# Altium PCB PCB1.PcbDoc
Units mm, origin at the board's own origin, x right, y up, seen from the top; angles counter-clockwise.
Board outline 126.62 x 101.6 mm, 2 copper layers (Top Layer, Bottom Layer); 25 components, 13 nets, 56 pads, 8 vias.
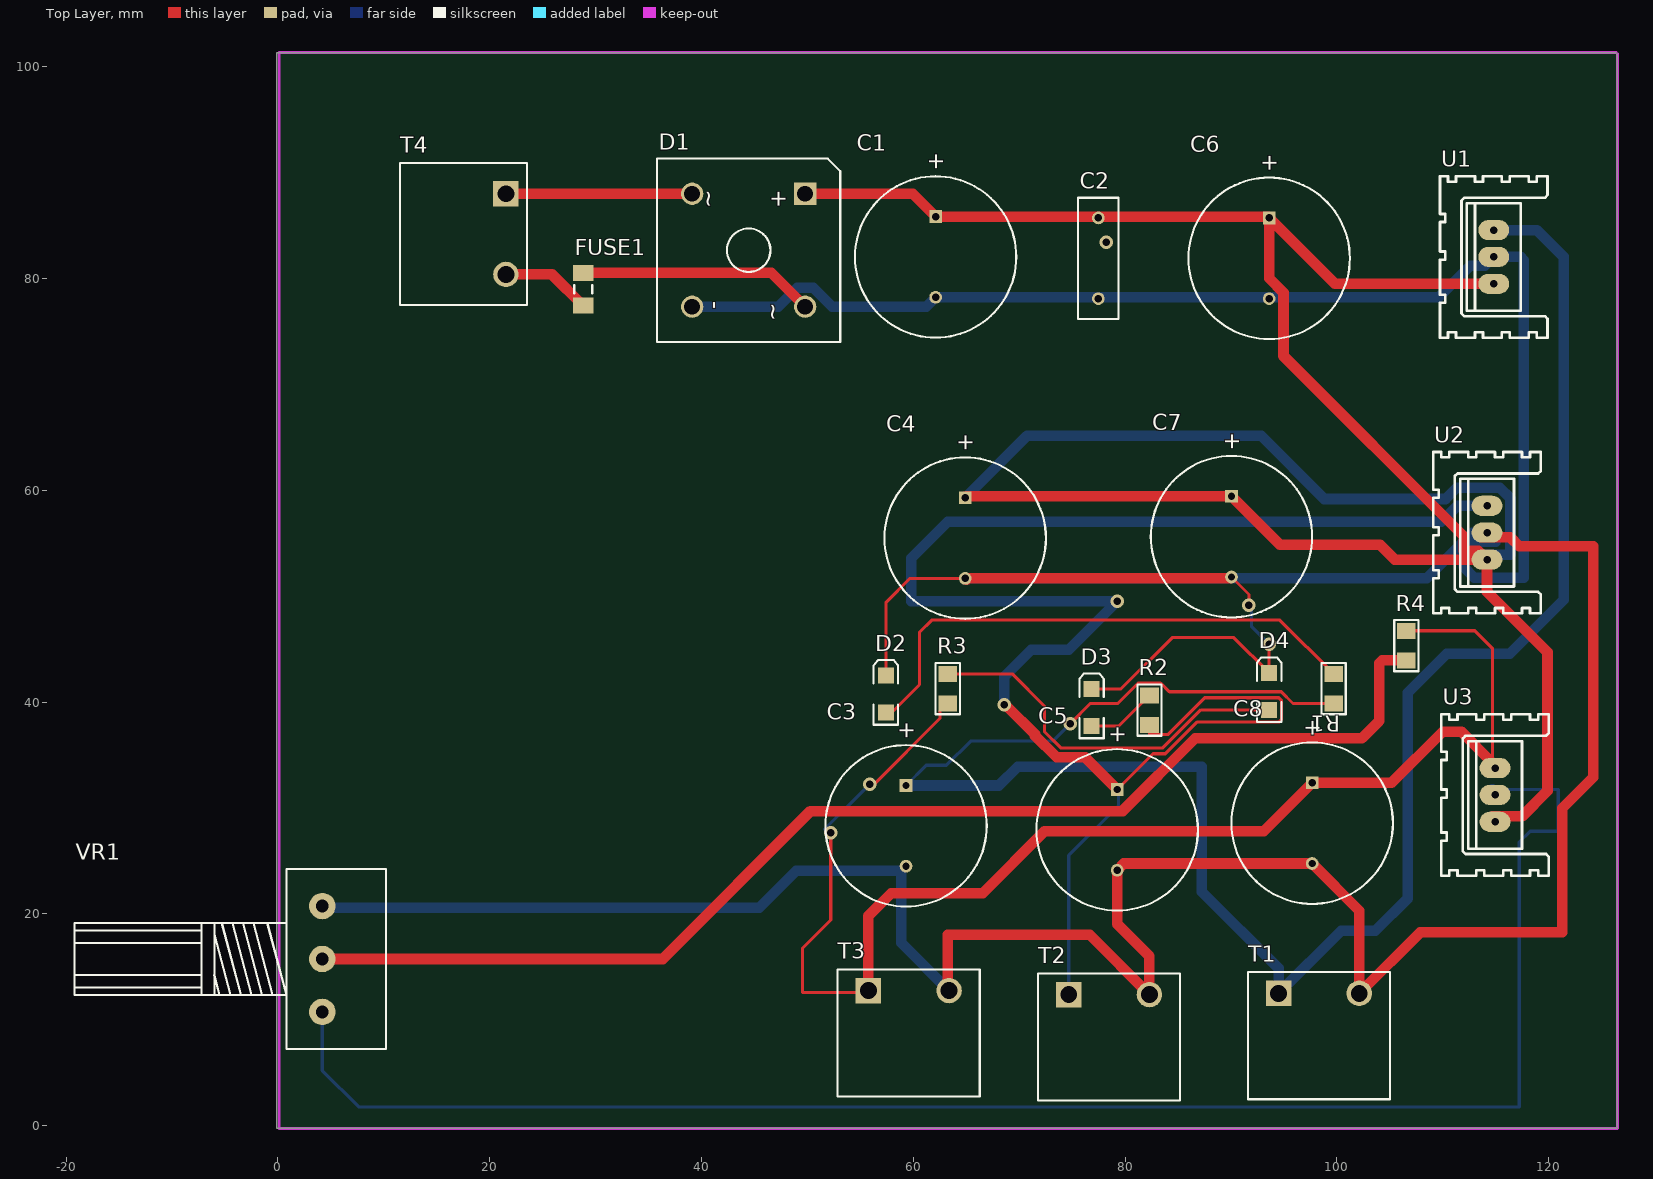
[diagram p0: Top Layer view]
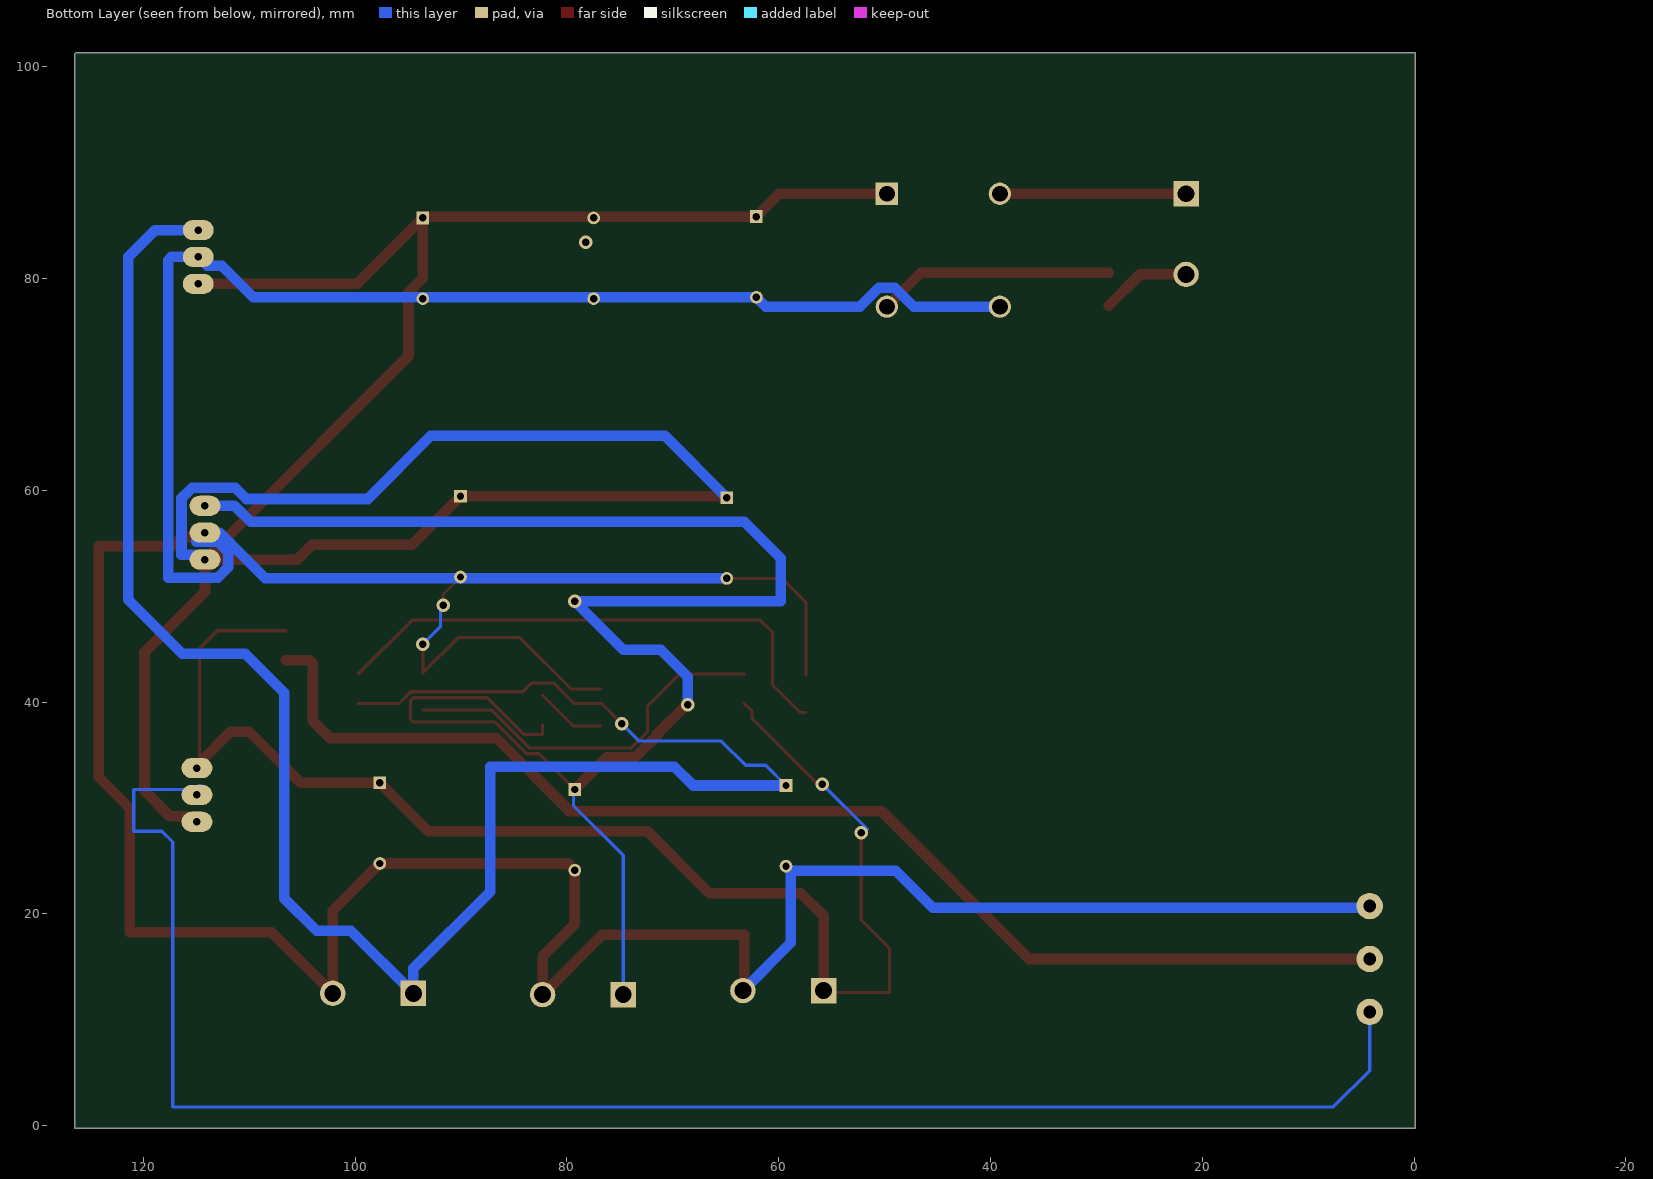
[diagram p1: Bottom Layer view, seen from below]

## Layer stack, top to bottom
Top Solder: solder mask 0.0102, Solder Resist, Dk 3.5
Top Layer: signal copper 0.0356
Dielectric 1: dielectric 0.32, FR-4, Dk 4.8
Bottom Layer: signal copper 0.0356
Bottom Solder: solder mask 0.0102, Solder Resist, Dk 3.5

## Board outline
-0.127,-0.254 -0.127,101.346 126.365,101.346 126.492,101.219 126.492,-0.254

## Design rules (kind name [scope] priority, off if disabled: settings)
Clearance [All] p1: gap=0.254
PolygonConnect [All] p1: connectstyle=Relief reliefconductorwidth=0.254 reliefentries=4 polygonreliefangle="90 Angle" airgapwidth=0.254
RoutingVias [All] p1: holewidth=0.711 width=1.27 viastyle="Through Hole" minholewidth=0.711 minwidth=1.27 maxholewidth=0.711 maxwidth=1.27
SolderMaskExpansion [All] p1: expansion=0.102
Width [All] p1: maxlimit=1 minlimit=0.254 preferedwidth=0.254
30 further rules are at their usual default settings.

## Components (designator, comment, footprint, x,y, rotation, side; value= is the part's Value field where it differs from the comment)
C1 "1000uf-35v" RB7.6-15 62.103,82.042 r90 top
C2 "Cap" RAD-0.3 77.47,81.915 r270 top
C3 "1000uf-35v" RB7.6-15 59.309,28.321 r90 top
C4 "1000uf-35v" RB7.6-15 64.897,55.499 r90 top
C5 "1000uf-35v" RB7.6-15 79.248,27.94 r90 top
C6 "1000uf-35v" RB7.6-15 93.599,81.915 r90 top
C7 "1000uf-35v" RB7.6-15 90.043,55.626 r90 top
C8 "1000uf-35v" RB7.6-15 97.663,28.575 r90 top
D1 "Bridge2" D-46_6A 44.45,82.677 r270 top
D2 "LED2" 3.2X1.6X1.1 57.404,40.767 r90 top
D3 "LED2" 3.2X1.6X1.1 76.835,39.497 r90 top
D4 "LED2" 3.2X1.6X1.1 93.599,41.021 r90 top
FUSE1 "FUSE" 1206_F 28.829,78.994 r90 top
R1 "2.2k red" 1206_R 99.695,41.275 r270 top
R2 "5.6k green" 1206_R 82.296,39.243 r270 top
R3 "7.6k yellow" 1206_R 63.246,41.275 r270 top
R4 "1k" 1206_R 106.553,45.339 r90 top
T1 "Phoenix 2 Pin" Phoenix_2PIN_RA_P7.62mm 98.298,8.509 r0 top
T2 "Phoenix 2 Pin" Phoenix_2PIN_RA_P7.62mm 78.486,8.382 r0 top
T3 "Phoenix 2 Pin" Phoenix_2PIN_RA_P7.62mm 59.563,8.763 r0 top
T4 "Phoenix 2 Pin" Phoenix_2PIN_RA_P7.62mm 17.526,84.201 r270 top
U1 "LM7805" LM78XXCT_HEATSINK 114.808,82.042 r90 top
U2 "LM7812" LM78XXCT_HEATSINK 114.173,56.007 r90 top
U3 "LM317" LM78XXCT_HEATSINK 114.935,31.242 r90 top
VR1 "10k" POT_WH148 4.191,15.748 r270 top

## Footprints (in the part's own frame and the unit in brackets; to place one, negate y for a bottom-side part, rotate by r counter-clockwise, add the part's x,y. Pads: shape width x height; smd on the part's side, far side on the other; paste and mask are expansions set on the pad)
3.2X1.6X1.1 [mm] "SMT LED; 2 Flat Leads"
  rect 1.5x1.5 smd: 1(-1.75,0) 2(1.75,0)
  silkscreen extent -2.9,-1.15 3.2,1.15
1206_F [mm] "Surface mount FUSE 1206"
  rect 1.5x1.9 smd: 1(-1.55,0) 2(1.55,0)
  silkscreen extent -0.4,-0.85 0.4,0.85, body extent -1.6,-0.83 1.6,0.83, height 0.56
1206_R [mil] "Resistor"
  rect 60x70 smd: 1(-55,0) 2(55,0)
  silkscreen extent -95,-45 95,45, body extent -79,-31 79,32, height 60
D-46_6A [mm] "Bridge Rectifier; 4 Terminals; Body 16.8 x 16.8 mm (typ); Pitch 10.67 mm"
  rect 2.1x2.1 hole 1.5: 1(-5.335,5.335)
  round 2.1 hole 1.5: 2(-5.335,-5.335) 3(5.335,-5.335) 4(5.335,5.335)
  silkscreen extent -8.65,-8.65 8.65,8.65, body extent -8.65,-8.65 8.65,8.65, height 6.35
LM78XXCT_HEATSINK [mil]
  oval 75x115 hole 28: 1(-100,0) 2(0,0) 3(100,0)
  silkscreen extent -300,-200 300,200
Phoenix_2PIN_RA_P7.62mm [mm] "Phoenix 2 Pin; Pitch 7.62mm;"
  rect 2.4x2.4 hole 1.6: 1(-3.81,4)
  round 2.4 hole 1.6: 2(3.81,4)
  silkscreen extent -6.71,-6 6.71,6, body extent -6.71,-6 6.71,6, height 8.55
POT_WH148 [mm] "Chip Variable Resistor, 3-Leads, Body 5x5x5mm"
  round 2.5 hole 1.2: 1(-5,0) 2(5,0) 3(0,0)
  silkscreen extent -8.5,-23.4 8.5,6, body extent -8.5,-23.55 8.5,6.25, height 21.5
RAD-0.3 [mm] "Radial Cap, Thru-Hole; 2 Leads; 0.3 in Pin Spacing"
  round 1.2 hole 0.7: 1(-3.81,0) 2(3.81,0)
  silkscreen extent -5.71,-1.91 5.71,1.91
RB7.6-15 [mm] "Polarized Capacitor (Radial); 2 Leads"
  rect 1.2x1.2 hole 0.7: 1(3.81,0)
  round 1.2 hole 0.7: 2(-3.81,0)
  silkscreen extent -7.62,-7.62 7.62,7.62

## Part data
C1 C3 C4 C5 C6 C7 C8: library part "Cap Pol1", "Polarized Capacitor (Radial)"
C2: "Capacitor"
D1: "Diode Bridge"
D2 D3 D4: "Typical RED, GREEN, YELLOW, AMBER GaAs LED"
FUSE1: library part "FUSE SMD"
R1 R2 R3 R4: library part "Resistor SMD", "SMD Resistor"
U1 U2 U3: library part LM78XX, "LM78XX"
VR1: library part "Pot Res Var", "Variable Resistor"

## Via types
v1: diameter 1.27, hole 0.711, Top Layer to Bottom Layer, 8 vias

## Nets (pads, with @x,y where several pads share a name; then routed paths per layer and width w, separated by ;. In a path a pad name is that pad's centre, name@x,y a point inside that pad or via, vN(x,y) a via of type N, cw(c..) or ccw(c..) an arc to the next point about the centre after c; other vN are vias at no path point)
NetC1_1: C1.1 C2.1 C4.1 C6.1 C7.1 D1.1 U1.1 U2.1 U3.1 | length 257.9
  Top Layer w1: D1.1 59.943,88.012 C1.1 93.472,85.852 C6.1 ; C4.1@65.024,59.436 C7.1 94.623,54.856 104.071,54.856 105.46,53.467 U2.1 ; U3.1@114.681,29.21 117.475,29.21 119.888,31.623 119.888,44.704 114.173,50.419 U2.1 ; U1.1 99.822,79.502 C6.1 ; C6.1 93.599,80.02 94.953,78.666 94.953,72.687 111.958,55.682 111.958,54.3 113.34,54.3 U2.1
  Bottom Layer w1: C4.1 70.739,65.151 92.837,65.151 98.806,59.182 110.252,59.182 ; 110.379,59.309 111.324,60.254 115.388,60.254 116.388,59.254 116.388,53.92 U2.1@113.72,53.92 ; U2.1 U2.1@114.626,53.014
NetC1_2: C1.2 C2.2 C3.2 C4.2 C5.2 C6.2 C7.2 C8.2 D1.3 D2.2 D3.2 D4.2 T1.2 T2.2 T3.2 U1.2 U2.2 VR1.1 | length 458.4
  Top Layer w0.3: D2.2 57.404,49.403 59.69,51.689 C4.2 ; D3.2 79.601,41.247 84.455,46.101 90.269,46.101 D4.2 v1(93.599,45.466) v1@93.472,45.593 ; C7.2 91.694,50.165 v1(91.694,49.149)
  Top Layer w1: T3.2@63.246,12.89 63.246,18.034 76.644,18.034 T2.2 82.296,16.002 79.248,19.05 C5.2 79.883,24.765 C8.2 102.108,20.32 T1.2 107.887,18.288 121.285,18.288 121.285,29.972 124.206,32.893 124.206,54.737 117.205,54.737 116.388,55.554 U2.2@113.72,55.554 ; C4.2 C4.2@65.151,51.689 ; C4.2@65.024,51.562 C4.2@65.151,51.689 ; C7.2@89.916,51.689 C4.2@65.151,51.689
  Bottom Layer w0.3: v1@91.821,49.53 91.948,49.53 91.948,47.117 v1(93.599,45.466)
  Bottom Layer w1: VR1.1@4.365,20.574 45.466,20.574 48.958,24.066 58.864,24.066 58.864,17.272 T3.2 ; D1.3 47.234,77.342 49.038,79.146 50.532,79.146 52.336,77.342 61.213,77.342 C1.2@61.976,78.105 ; C1.2 109.617,78.232 112.593,81.209 113.975,81.209 U1.2 117.332,82.042 117.658,81.717 117.658,51.76 112.958,51.76 111.958,52.76 111.958,54.174 112.958,55.174 115.006,55.174 U2.2 112.792,56.007 108.474,51.689 C4.2
NetC3_1: C3.1 R1.2 T1.1 U1.3 | length 192
  Top Layer w0.3: v1(74.803,37.973) 76.708,39.878 79.312,39.878 81.24,41.806 83.352,41.806 84.179,40.979 94.746,40.979 95.847,39.878 R1.2
  Bottom Layer w0.3: C3.1 61.214,34.036 63.119,34.036 65.405,36.322 73.152,36.322 v1(74.803,37.973)
  Bottom Layer w1: C3.1 68.072,32.131 69.85,33.909 87.249,33.909 87.249,22.098 94.488,14.859 T1.1 100.394,18.415 103.632,18.415 106.68,21.463 106.68,40.894 110.363,44.577 116.332,44.577 121.412,49.657 121.412,82.042 118.872,84.582 U1.3
NetC5_1: C5.1 R2.2 T2.1 U2.3 | length 166.1
  Top Layer w0.3: C5.1 82.631,35.133 83.795,35.133 86.779,38.117 94.516,38.117 94.753,38.354 94.753,40.188 94.516,40.425 87.521,40.425 84.03,36.934 82.296,36.934 R2.2
  Top Layer w1: v1@68.834,39.624 71.486,36.972 71.486,36.837 73.54,34.783 76.215,34.783 C5.1
  Bottom Layer w0.3: T2.1 74.676,25.527 79.375,30.226 C5.1@79.375,31.623
  Bottom Layer w1: v1(68.58,39.751) 68.58,42.41 71.128,44.958 74.676,44.958 v1(79.248,49.53) 59.817,49.53 59.817,53.594 63.246,57.023 109.866,57.023 111.39,58.547 U2.3
NetC8_1: C8.1 R3.2 R4.2 T3.1 U3.3 | length 133.1
  Top Layer w0.3: v1(52.197,27.686) 52.197,19.431 49.53,16.764 49.53,12.573 55.563,12.573 T3.1 ; v1@56.305,32.258 62.507,38.46 62.507,39.139 R3.2 ; R4.2 113.03,46.736 114.681,45.085 U3.3@114.681,34.29
  Top Layer w1: T3.1 55.753,19.812 57.912,21.971 66.548,21.971 72.39,27.813 93.091,27.813 C8.1 105.156,32.385 109.982,37.211 111.76,37.211 U3.3@114.681,34.29
  Bottom Layer w0.3: 51.598,27.976 v1(55.88,32.258)
NetD1_2: D1.2 T4.1 | length 17.7
  Top Layer w0.254: T4.1 T4.1@21.59,88.075
  Top Layer w1: T4.1 D1.2@39.114,88.011
NetD1_4: D1.4 FUSE1.2 | length 22.3
  Top Layer w1: FUSE1.2 46.583,80.544 D1.4
NetD2_1: D2.1 R1.1 | length 50.9
  Top Layer w0.3: D2.1 57.94,39.017 60.579,41.656 60.579,46.609 61.722,47.752 94.615,47.752 R1.1
NetD3_1: D3.1 R2.1 | length 6.7
  Top Layer w0.3: D3.1 79.403,37.747 R2.1
NetD4_1: D4.1 R3.1 | length 36.1
  Top Layer w0.3: R3.1 69.342,42.672 72.39,39.624 72.39,37.211 73.914,35.687 83.566,35.687 87.15,39.271 D4.1
NetFUSE1_1: FUSE1.1 T4.2 | length 8.5
  Top Layer w1: T4.2 25.882,80.391 FUSE1.1
NetR4_1: R4.1 VR1.3 | length 117.2
  Top Layer w1: VR1.3 36.322,15.748 50.292,29.718 79.756,29.718 86.614,36.576 102.362,36.576 104.013,38.227 104.013,43.688 104.267,43.942 R4.1
NetU3_2: U3.2 VR1.2 | length 160.1
  Bottom Layer w0.3: VR1.2 4.191,5.207 7.62,1.778 117.221,1.778 117.221,26.797 118.237,27.813 120.904,27.813 120.904,31.75 U3.2@114.681,31.75
  Bottom Layer w1: U3.2@114.681,30.917 U3.2@114.681,31.75
copper on no net:
  other v1: 78.232,83.439

## Keep-outs
Top Layer:
  lines w0.254: 0.127,-0.254 0.127,101.346 126.365,101.346 126.492,101.219 126.492,-0.254 0.127,-0.254

## Text inside footprints (layer, text, board x,y; h text height)
C1: Top Overlay "+" at 62.84,90.174 h1.5 r90
C3: Top Overlay "+" at 60.046,36.453 h1.5 r90
C4: Top Overlay "+" at 65.634,63.631 h1.5 r90
C5: Top Overlay "+" at 79.985,36.072 h1.5 r90
C6: Top Overlay "+" at 94.336,90.047 h1.5 r90
C7: Top Overlay "+" at 90.78,63.758 h1.5 r90
C8: Top Overlay "+" at 98.4,36.707 h1.5 r90
D1: Top Overlay "~" at 40.013,88.4 h1.5 r270; Top Overlay "~" at 46.109,77.732 h1.5 r270; Top Overlay "-" at 40.641,77.852 h1.5 r270; Top Overlay "+" at 46.617,88.4 h1.5 r270